# Altium PCB PCB.pcbdoc
Units mil, origin at the board's own origin, x right, y up, seen from the top; angles counter-clockwise.
Board outline 2845.94 x 2020.39 mil, 2 copper layers (Top Layer, Bottom Layer); 66 components, 65 nets, 252 pads, 68 vias.
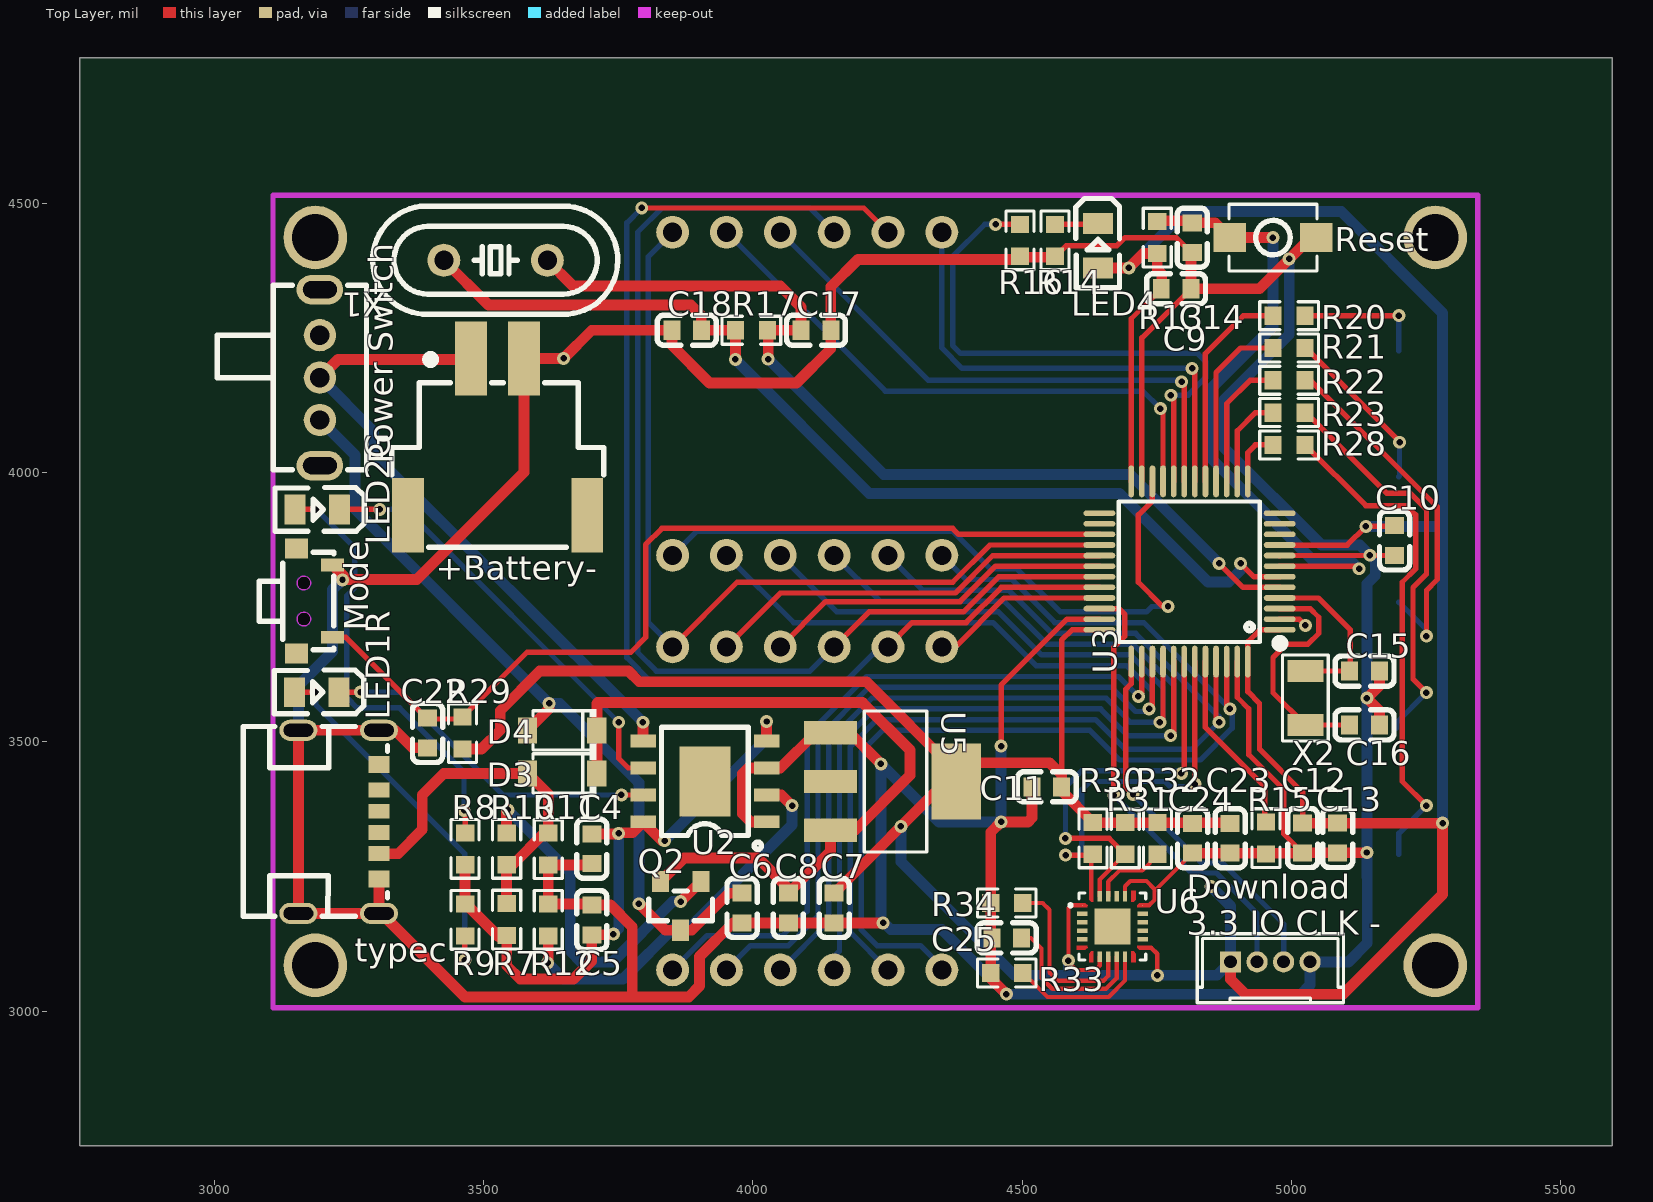
[diagram p0: Top Layer view]
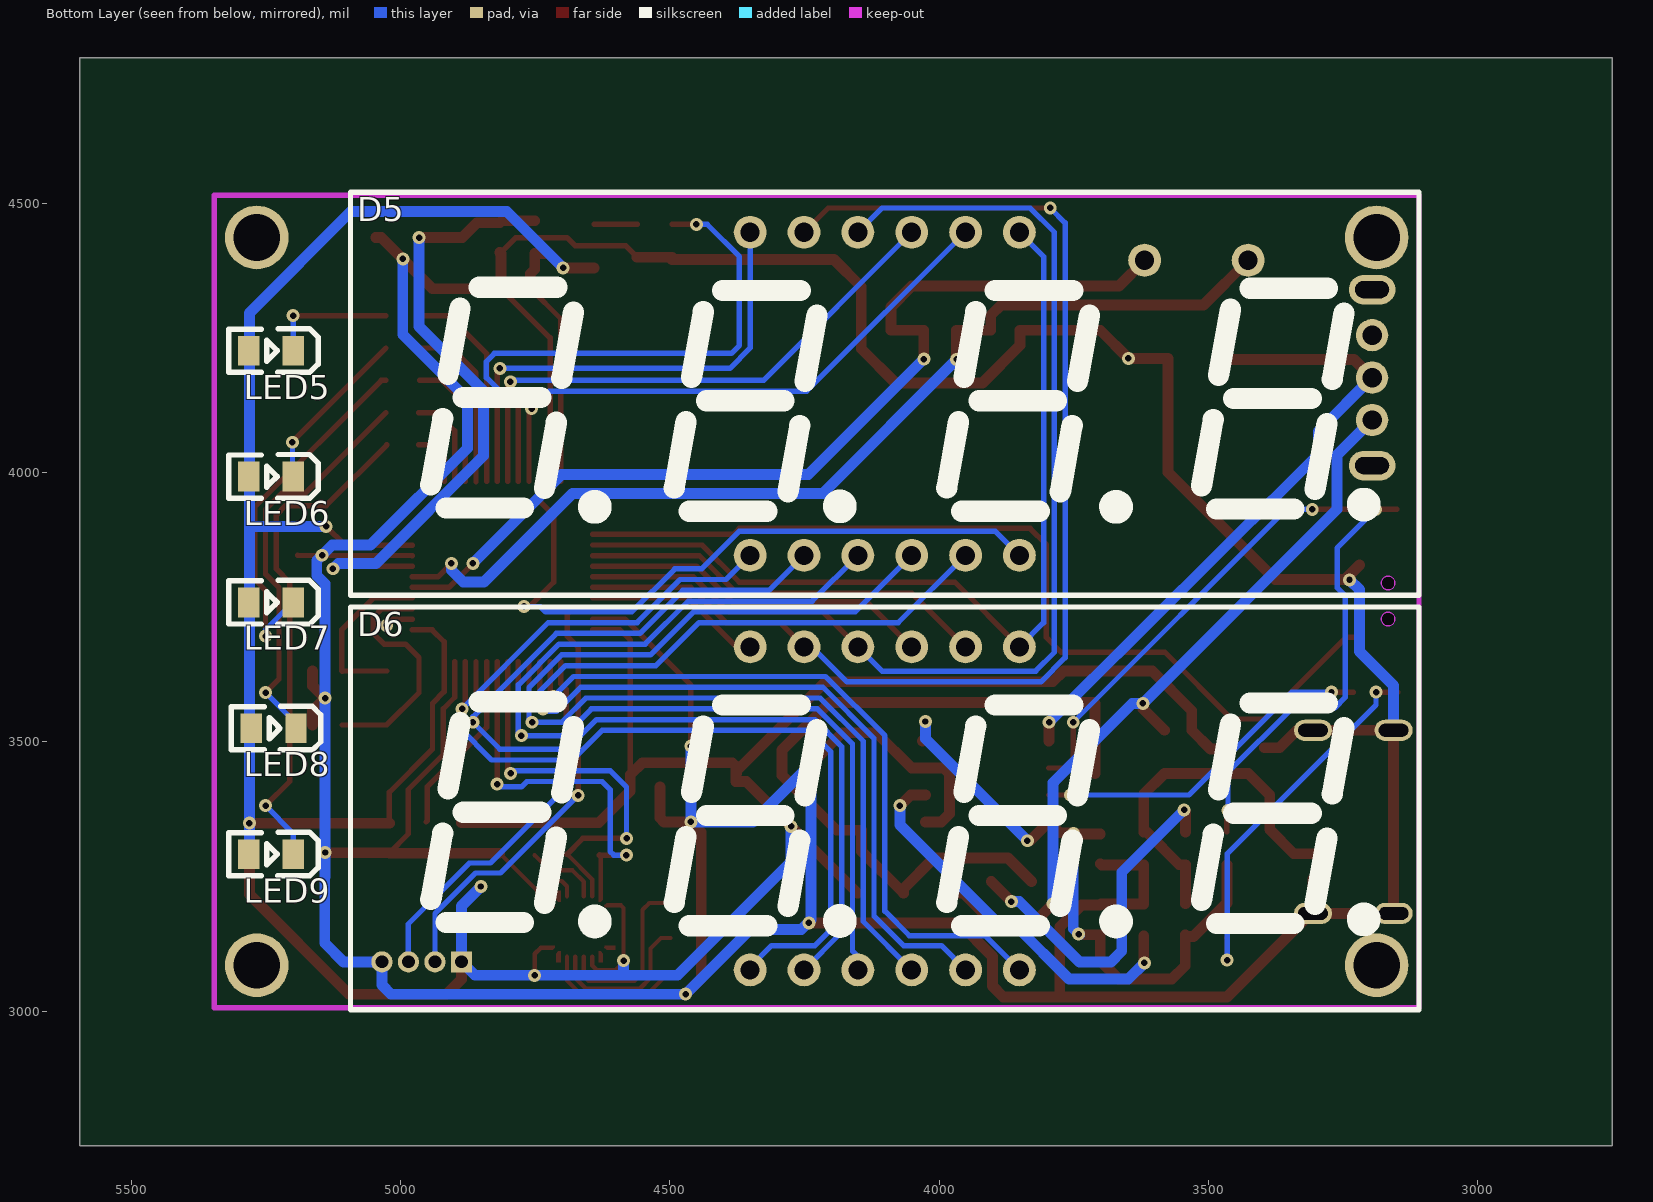
[diagram p1: Bottom Layer view, seen from below]

## Layer stack, top to bottom
Top Layer: signal copper (thickness not stored)
Dielectric: dielectric 12.6, FR-4, Dk 4.8
Bottom Layer: signal copper (thickness not stored)

## Board outline
5595.94,2750 2750,2750 2750,4770.39 5595.94,4770.39

## Design rules (kind name [scope] priority, off if disabled: settings)
BoardOutlineClearance copperThickness1oz [All] p0: genericclearance=10 ignorepadtopadclearanceinfootprint=FALSE except(0: Arc-SplitContinuation Track-SplitContinuation SMDPad-SplitContinuation THPad-SplitContinuation Via-SplitContinuation Fill-SplitContinuation Poly-SplitContinuation Region-SplitContinuation Text-SplitContinuation; 6: Track-CutoutEdge SMDPad-CutoutEdge THPad-CutoutEdge Via-CutoutEdge Region-CutoutEdge; 11.8: Track-OutlineEdge SMDPad-OutlineEdge THPad-OutlineEdge Via-OutlineEdge Fill-OutlineEdge Region-OutlineEdge Poly-OutlineEdge Text-OutlineEdge Fill-CutoutEdge)
BoardOutlineClearance copperThickness2oz [All] p0: genericclearance=10 ignorepadtopadclearanceinfootprint=FALSE except(0: Arc-SplitContinuation Track-SplitContinuation SMDPad-SplitContinuation THPad-SplitContinuation Via-SplitContinuation Fill-SplitContinuation Poly-SplitContinuation Region-SplitContinuation Text-SplitContinuation; 6: Track-CutoutEdge SMDPad-CutoutEdge THPad-CutoutEdge Via-CutoutEdge Region-CutoutEdge; 11.8: Track-OutlineEdge SMDPad-OutlineEdge THPad-OutlineEdge Via-OutlineEdge Fill-OutlineEdge Region-OutlineEdge Poly-OutlineEdge Text-OutlineEdge Fill-CutoutEdge)
Clearance copperThickness1oz [(InNet('$1N2871') OR InNet('GND') OR InNet('$1N3338') OR InNet('VCC3V3') OR InNet('VOUT') OR InNet('RESET') OR InNet('PC15') OR InNet('PC14') OR InNet('OSCIN') OR InNet('OSCOUT') OR InNet('SWIO') OR InNet('SWCLK') OR InNet('VBUS') OR InNet('PA5') OR InNet('PA0') OR InNet('PA4') OR InNet('PA1') OR InNet('PA3') OR InNet('PB11') OR InNet('PB0') OR InNet('PA6') OR InNet('PB10') OR InNet('PB1') OR InNet('PA7') OR InNet('PA2') OR InNet('PA15') OR InNet('PB9') OR InNet('PB3') OR InNet('PB8') OR InNet('PB4') OR InNet('PB15') OR InNet('PA10') OR InNet('PA12') OR InNet('PA8') OR InNet('PA9') OR InNet('PA11') OR InNet('PB5') OR InNet('$1N2192') OR InNet('$1N5823') OR InNet('$1N2208') OR InNet('$1N5869') OR InNet('$1N5919') OR InNet('$1N9002') OR InNet('$1N9250') OR InNet('$1N9224') OR InNet('$1N9276') OR InNet('$1N2044') OR InNet('$1N2879') OR InNet('BOOT0') OR InNet('BOOT1') OR InNet('PB6') OR InNet('PB7') OR InNet('PB14') OR InNet('PB13') OR InNet('PB12') OR InNet('PC13') OR InNet('VBAT') OR InNet('INT') OR InNet('$1N18297') OR InNet('$1N29479') OR InNet('NCS') OR InNet('$1N29483') OR InNet('$1N29475') OR InNet('ESD') OR InNet('ESC'))] p1: gap=7 ignorepadtopadclearanceinfootprint=FALSE except(4: Track-Track; 6: Track-SMDPad SMDPad-SMDPad Track-THPad SMDPad-THPad THPad-THPad Track-Via SMDPad-Via THPad-Via Via-Via SMDPad-Fill THPad-Fill Via-Fill Fill-Fill Track-Region SMDPad-Region THPad-Region Via-Region Region-Region Track-Poly SMDPad-Poly THPad-Poly Via-Poly Fill-Poly Region-Poly Poly-Poly Track-Text SMDPad-Text THPad-Text Via-Text Fill-Text Region-Text Poly-Text Text-Text; 6.9: Track-Hole SMDPad-Hole THPad-Hole Via-Hole Fill-Hole Region-Hole Poly-Hole Text-Hole Sheet-Hole; 11.8: Track-Fill Fill-Region Track-Sheet SMDPad-Sheet THPad-Sheet Via-Sheet Fill-Sheet Region-Sheet Poly-Sheet Text-Sheet)
Clearance copperThickness2oz [All] p1: gap=7 ignorepadtopadclearanceinfootprint=FALSE except(6: Track-SMDPad SMDPad-SMDPad Track-THPad SMDPad-THPad THPad-THPad Track-Via SMDPad-Via THPad-Via Via-Via SMDPad-Fill THPad-Fill Via-Fill Fill-Fill Track-Region SMDPad-Region THPad-Region Via-Region Region-Region Track-Poly SMDPad-Poly THPad-Poly Via-Poly Fill-Poly Region-Poly Poly-Poly Track-Text SMDPad-Text THPad-Text Via-Text Fill-Text Region-Text Poly-Text Text-Text; 6.9: Track-Hole SMDPad-Hole THPad-Hole Via-Hole Fill-Hole Region-Hole Poly-Hole Text-Hole Sheet-Hole; 8: Track-Track; 11.8: Track-Fill Fill-Region Track-Sheet SMDPad-Sheet THPad-Sheet Via-Sheet Fill-Sheet Region-Sheet Poly-Sheet Text-Sheet)
DiffPairsRouting differentialPair [All] p1: maxuncoupledlength=10 minlimit=6 maxlimit=6 mostfreqgap=6 toplayer_minwidth=5 toplayer_prefwidth=10 toplayer_maxwidth=100 bottomlayer_minwidth=5 bottomlayer_prefwidth=10 bottomlayer_maxwidth=100
PasteMaskExpansion pasteMaskExpansion [All] p1: expansion=0
PlaneConnect innerPlane [All] p1: planeconnectstyle=Relief reliefexpansion=20 reliefentries=4 reliefconductorwidth=10 reliefairgap=10
PolygonConnect copperRegion [All] p1: connectstyle=Relief reliefentries=4 reliefconductorwidth=10 polygonreliefangle="90 Angle" airgapwidth=10
RoutingVias viaSize [All] p1: viastyle="Through Hole" holewidth=12.0078 minholewidth=11.811 maxholewidth=248.0314 width=24.0158 minwidth=19.685 maxwidth=393.7008
SolderMaskExpansion solderMaskExpansion [All] p1: useseparateexpansions=TRUE expansion=2 expansionbottom=2
Width copperThickness1oz [All] p1: maxlimit=100 minlimit=5 preferedwidth=10
Width copperThickness2oz [All] p1: maxlimit=100 minlimit=8 preferedwidth=10

## Components (designator, comment, footprint, x,y, rotation, side; value= is the part's Value field where it differs from the comment)
+Battery- "ZX-XH2.54-2PWT" CONN-SMD_2P-P2.54_MEGASTAR_ZX-XH2.54-2PWT 3525.95,4066.38 r0 top
C4 "CGA0603X5R106K100JT" C0603 3700.95,3301.38 r90 top
C5 "CGA0603X7R104K500JT" C0603 3700.95,3169.19 r270 top
C6 "CGA0603X5R106K100JT" C0603 3979.87,3191.37 r90 top
C7 "CGA0603X5R106K100JT" C0603 4150.94,3191.38 r90 top
C8 "CGA0603X5R106K100JT" C0603 4065.95,3191.38 r270 top
C9 "CGA0603X7R104K500JT" C0603 4785.94,4341.38 r180 top
C10 "CGA0603X7R104K500JT" C0603 5191.65,3873.82 r90 top
C11 "CGA0603X7R104K500JT" C0603 4545.94,3416.38 r0 top
C12 "CGA0603X7R104K500JT" C0603 5020.94,3321.38 r90 top
C13 "CGA0603X7R104K500JT" C0603 5085.94,3321.38 r270 top
C14 "CGA0603X7R104K500JT" C0603 4815.94,4436.38 r270 top
C15 "CC0603JRNPO9BN200" C0603 5135.94,3631.38 r180 top
C16 "CC0603JRNPO9BN200" C0603 5135.94,3531.38 r180 top
C17 "CC0603JRNPO9BN200" C0603 4117.19,4264.32 r180 top
C18 "CC0603JRNPO9BN200" C0603 3877.19,4264.32 r0 top
C22 "CGA0603X7R104K500JT" C0603 3395.95,3516.38 r270 top
C23 "CGA0603X7R103K500JT" C0603 4886.47,3320.85 r90 top
C24 "CGA0603X7R104K500JT" C0603 4816.47,3320.85 r90 top
C25 "CGA0603X7R104K500JT" C0603 4471.47,3135.85 r0 top
D3 "1N5819W_C5451628" SOD-123_L2.7-W1.6-LS3.7-RD 3645.95,3441.38 r180 top
D4 "1N5819W_C5451628" SOD-123_L2.7-W1.6-LS3.7-RD 3645.95,3521.38 r180 top
D5 "FJ5461AH 红色" LED-SEG-TH_FJ5461AH 4100.94,4146.38 r180 bottom
D6 "FJ5461AH 红色" LED-SEG-TH_FJ5461AH 4100.94,3376.38 r180 bottom
"Download / 3.3 IO CLK -" "HX-MX1.25-4PZZ-M" CONN-TH_4P-P1.25_HX-1.25MM-4P-ZZ-MS 4960.94,3091.38 r0 top
LED1R "KT-0805G" LED0805-R-RD 3189.99,3592.33 r180 top
LED2G "KT-0805G" LED0805-R-RD 3190.95,3931.38 r180 top
LED4 "KT-0805G" LED0805-R-RD 4640.94,4421.38 r270 top
LED5 "KT-0805G" LED0805-R-RD 5240.94,4226.38 r0 bottom
LED6 "KT-0805G" LED0805-R-RD 5240.94,3992.63 r0 bottom
LED7 "KT-0805G" LED0805-R-RD 5240.94,3758.88 r0 bottom
LED8 "KT-0805G" LED0805-R-RD 5235.94,3525.13 r0 bottom
LED9 "KT-0805G" LED0805-R-RD 5240.94,3291.38 r0 bottom
Mode "TSC01A-TDW1EH3.5" KEY-SMD_4P-L4.6-W2.4_TSC01A-TDW1FH3.5 3185.95,3761.38 r90 top
"Power Switch" "SK12D07VG4" SW-TH_SK12D07VG4 3195.95,4176.38 r270 top
Q2 "AO3401A_C347476" SOT-23_L2.9-W1.3-P1.90-LS2.4-BR 3865.95,3195.52 r90 top
R7 "FRL0603JR400TS" R0603 3542.74,3169.86 r90 top
R8 "FRC0603F1001TS" R0603 3465.61,3301.38 r270 top
R9 "FRC0603F1001TS" R0603 3465.61,3169.18 r90 top
R10 "RCA0310KJLF" R0603 3542.74,3301.38 r90 top
R11 "RCA0310KJLF" R0603 3619.87,3300.7 r90 top
R12 "FRC0603J122 TS" R0603 3619.87,3169.18 r90 top
R13 "RCA0310KJLF" R0603 4750.94,4436.38 r90 top
R14 "FRC0603F5600TS" R0603 4560.94,4431.38 r270 top
R15 "RCA03100KJLF" R0603 4952.86,3321.38 r270 top
R16 "RCA03100KJLF" R0603 4495.94,4431.38 r270 top
R17 "FRC0603J105 TS" R0603 3997.19,4264.32 r0 top
R20 "FRC0603F5600TS" R0603 4995.94,4291.38 r180 top
R21 "FRC0603F5600TS" R0603 4995.94,4231.38 r180 top
R22 "FRC0603F5600TS" R0603 4995.94,4171.38 r180 top
R23 "FRC0603F5600TS" R0603 4995.94,4111.38 r180 top
R28 "FRC0603F5600TS" R0603 4995.94,4051.38 r180 top
R29 "RCA0310KJLF" R0603 3460.95,3516.38 r90 top
R30 "RCA0310KJLF" R0603 4631.47,3320.85 r90 top
R31 "RCA0310KJLF" R0603 4691.47,3320.85 r90 top
R32 "RCA0310KJLF" R0603 4751.47,3320.85 r90 top
R33 "RCA0310KJLF" R0603 4471.47,3070.85 r0 top
R34 "RCA0310KJLF" R0603 4471.47,3200.85 r0 top
Reset "KEY-3*4*2" SW-SMD_L4.0-W2.9-LS5.0 4965.94,4436.38 r0 top
typec "USB-TYPE-C-SMD6" MICRO-USB-SMD_USB-TYPE-C-SMD6 3230.95,3351.38 r270 top
U2 "TP4056_C21713961" ESOP-8_L4.9-W3.9-P1.27-LS6.0-BL-EP 3910.95,3426.38 r90 top
U3 "STM32F103C8T6" LQFP-48_L7.0-W7.0-P0.50-LS9.0-BL 4810.94,3816.38 r90 top
U5 "AMS1117-3.3V_C5205141" SOT-223-3_L6.5-W3.4-P2.30-LS7.0-BR 4260.94,3426.38 r180 top
U6 "MPU-6500_C50278" QFN-24_L3.0-W3.0-P0.40-BL-EP 4667.71,3157.03 r270 top
X1 "8MHZ" HC-49S_L11.5-W5.0-P4.88 3522.19,4394.32 r0 top
X2 "32.768KHZ" CRYSTAL-SMD_L3.2-W1.5-1 5025.94,3581.38 r90 top

## Footprints (in the part's own frame and the unit in brackets; to place one, negate y for a bottom-side part, rotate by r counter-clockwise, add the part's x,y. Pads: shape width x height; smd on the part's side, far side on the other; paste and mask are expansions set on the pad)
C0603 [mm]
  rect 0.8x0.9 smd: 1(-0.7,0) 2(0.7,0)
  silkscreen extent -1.39,-0.71 1.39,0.71
CONN-SMD_2P-P2.54_MEGASTAR_ZX-XH2.54-2PWT [mm]
  rect 1.5x3.5 smd: 1(-1.25,3.7) 2(1.25,3.7) 3(-4.23,-3.7) 4(4.23,-3.7)
  silkscreen extent -5,-5.21 5,3.85
CONN-TH_4P-P1.25_HX-1.25MM-4P-ZZ-MS [mm]
  rect 1x1 hole 0.6: 1(-1.875,0)
  round 1 hole 0.6: 2(-0.625,0) 3(0.625,0) 4(1.875,0)
  silkscreen extent -3.45,-1.92 3.45,1.33
CRYSTAL-SMD_L3.2-W1.5-1 [mm]
  rect 1.05x1.7 smd: 1(-1.275,0) 2(1.275,0)
  silkscreen extent -2.03,-1.08 2.03,1.08
ESOP-8_L4.9-W3.9-P1.27-LS6.0-BL-EP [mm]
  rect 0.6x1.2 smd: 1(-1.905,-2.908) 2(-0.635,-2.908) 3(0.635,-2.908) 4(1.905,-2.908) 5(1.905,2.908) 6(0.635,2.908) 7(-0.635,2.908) 8(-1.905,2.908)
  rect 3.3x2.4 smd: 9(0,0)
  silkscreen extent -3.2,-2.67 2.55,2.05
HC-49S_L11.5-W5.0-P4.88 [mm]
  round 1.56 hole 0.9: 1(-2.44,0) 2(2.44,0)
  silkscreen extent -5.8,-2.54 5.77,2.54
KEY-SMD_4P-L4.6-W2.4_TSC01A-TDW1FH3.5 [mm]
  rect 0.6x1.1 smd: 1(-1.7,-0.85) 2(1.7,-0.85)
  rect 0.95x1.1 smd: 3(2.475,0.85) 4(-2.475,0.85)
  Board Outline Layer circle w0.005: c-0.85,0.5 r0.325
  Board Outline Layer circle w0.005: c0.85,0.5 r0.325
  Board Outline Layer region: -0.85,0.175 -0.991,0.207 -1.104,0.297 -1.167,0.428 -1.167,0.572 -1.104,0.703 -0.991,0.793 -0.85,0.825 -0.85,0.825 -0.709,0.793 -0.596,0.703 -0.533,0.572 -0.533,0.428 -0.596,0.297 -0.709,0.207 -0.85,0.175
  Board Outline Layer region: 0.85,0.175 0.709,0.207 0.596,0.297 0.533,0.428 0.533,0.572 0.596,0.703 0.709,0.793 0.85,0.825 0.85,0.825 0.991,0.793 1.104,0.703 1.167,0.572 1.167,0.428 1.104,0.297 0.991,0.207 0.85,0.175
  Multi-Layer board cut-out: -0.85,0.175 -0.991,0.207 -1.104,0.297 -1.167,0.428 -1.167,0.572 -1.104,0.703 -0.991,0.793 -0.85,0.825 -0.85,0.825 -0.709,0.793 -0.596,0.703 -0.533,0.572 -0.533,0.428 -0.596,0.297 -0.709,0.207 -0.85,0.175
  Multi-Layer board cut-out: 0.85,0.175 0.709,0.207 0.596,0.297 0.533,0.428 0.533,0.572 0.596,0.703 0.709,0.793 0.85,0.825 0.85,0.825 0.991,0.793 1.104,0.703 1.167,0.572 1.167,0.428 1.104,0.297 0.991,0.207 0.85,0.175
  silkscreen extent -2.3,-0.9 2.3,2.6
LED0805-R-RD [mm]
  rect 1x1.4 smd: 1(1.05,0) 2(-1.05,0)
  silkscreen extent -2.22,-1.04 1.99,1.01
LED-SEG-TH_FJ5461AH [mm]
  round 1.55 hole 0.9: 1(-6.35,-7.62) 2(-3.81,-7.62) 3(-1.27,-7.62) 4(1.27,-7.62) 5(3.81,-7.62) 6(6.35,-7.62) 7(6.35,7.62) 8(3.81,7.62) 9(1.27,7.62) 10(-1.27,7.62) 11(-3.81,7.62) 12(-6.35,7.62)
  silkscreen extent -25.2,-9.5 25.2,9.5
LQFP-48_L7.0-W7.0-P0.50-LS9.0-BL [mm]
  oval 0.27x1.5 smd: 1(-2.75,-4.25) 2(-2.25,-4.25) 3(-1.75,-4.25) 4(-1.25,-4.25) 5(-0.75,-4.25) 6(-0.25,-4.25) 7(0.25,-4.25) 8(0.75,-4.25) 9(1.25,-4.25) 10(1.75,-4.25) 11(2.25,-4.25) 12(2.75,-4.25) 25(2.75,4.25) 26(2.25,4.25) 27(1.75,4.25) 28(1.25,4.25) 29(0.75,4.25) 30(0.25,4.25) 31(-0.25,4.25) 32(-0.75,4.25) 33(-1.25,4.25) 34(-1.75,4.25) 35(-2.25,4.25) 36(-2.75,4.25)
  oval 1.5x0.27 smd: 13(4.25,-2.75) 14(4.25,-2.25) 15(4.25,-1.75) 16(4.25,-1.25) 17(4.25,-0.75) 18(4.25,-0.25) 19(4.25,0.25) 20(4.25,0.75) 21(4.25,1.25) 22(4.25,1.75) 23(4.25,2.25) 24(4.25,2.75) 37(-4.25,2.75) 38(-4.25,2.25) 39(-4.25,1.75) 40(-4.25,1.25) 41(-4.25,0.75) 42(-4.25,0.25) 43(-4.25,-0.25) 44(-4.25,-0.75) 45(-4.25,-1.25) 46(-4.25,-1.75) 47(-4.25,-2.25) 48(-4.25,-2.75)
  silkscreen extent -3.59,-4.46 3.3,3.34
MICRO-USB-SMD_USB-TYPE-C-SMD6 [mm]
  oval 1x1.8 hole 0.6 slot 1.4 at 90 deg: 1(-4.32,1.9) 2(4.32,1.9) 3(-4.32,-1.9) 4(4.32,-1.9)
  rect 0.7x1 smd: A5(-0.5,1.9) A9(1.5,1.9) B5(0.5,1.9) B9(-1.5,1.9)
  rect 0.8x1 smd: A12(2.7,1.9) B12(-2.7,1.9)
  silkscreen extent -4.5,-4.5 4.45,2.3
QFN-24_L3.0-W3.0-P0.40-BL-EP [mm]
  round 0.04 smd: 1(-1,-1.427) 6(1,-1.427) 7(1.427,-1) 12(1.427,1) 13(1,1.427) 18(-1,1.427) 19(-1.427,1) 24(-1.427,-1)
  rect 0.2x0.505 smd: 2(-0.6,-1.427) 3(-0.2,-1.427) 4(0.2,-1.427) 5(0.6,-1.427) 14(0.6,1.427) 15(0.2,1.427) 16(-0.2,1.427) 17(-0.6,1.427)
  rect 0.505x0.2 smd: 8(1.427,-0.6) 9(1.427,-0.2) 10(1.427,0.2) 11(1.427,0.6) 20(-1.427,0.6) 21(-1.427,0.2) 22(-1.427,-0.2) 23(-1.427,-0.6)
  rect 1.7x1.7 smd: 25(0,0)
  Top Layer region: -1.1,1.68 -0.9,1.68 -0.9,1.175 -1,1.174 -1.1,1.274
  Top Layer region: -1.68,-1.1 -1.274,-1.1 -1.174,-1 -1.175,-0.9 -1.68,-0.9
  Top Layer region: 1.68,-1.1 1.275,-1.1 1.175,-1 1.175,-0.9 1.68,-0.9
  Top Layer region: 1.68,1.1 1.274,1.1 1.174,1 1.175,0.9 1.68,0.9
  Top Layer region: 1.1,1.68 0.9,1.68 0.9,1.175 1,1.174 1.1,1.274
  Top Layer region: -1.1,-1.68 -0.9,-1.68 -0.9,-1.175 -1,-1.174 -1.1,-1.275
  Top Layer region: 1.1,-1.68 0.9,-1.68 0.9,-1.175 1,-1.175 1.1,-1.275
  Top Layer region: -1.68,1.1 -1.274,1.1 -1.174,1 -1.175,0.9 -1.68,0.9
  silkscreen extent -1.58,-2.05 1.58,1.58
R0603 [mil]
  rect 31.75x34.02 smd: 1(-29.66,0) 2(29.66,0)
  silkscreen extent -55,-26 55,26
SOD-123_L2.7-W1.6-LS3.7-RD [mm]
  rect 0.91x1.22 smd: 1(-1.635,0) 2(1.635,0)
  silkscreen extent -1.6,-1 1.38,1
SOT-23_L2.9-W1.3-P1.90-LS2.4-BR [mm]
  rect 1x0.8 smd: 1(1.15,-0.95) 2(1.15,0.95) 3(-1.15,0)
  silkscreen extent -0.7,-1.5 0.7,1.5
SOT-223-3_L6.5-W3.4-P2.30-LS7.0-BR [mm]
  rect 2.5x1.1 smd: 1(2.97,-2.3) 2(2.97,0) 3(2.97,2.3)
  rect 2.34x3.6 smd: 4(-2.97,0)
  silkscreen extent -1.57,-3.33 1.37,3.33
SW-SMD_L4.0-W2.9-LS5.0 [mm]
  rect 1.53x1.36 smd: 1(-2.035,0) 2(2.035,0)
  silkscreen extent -2.08,-1.58 2.08,1.58
SW-TH_SK12D07VG4 [mil]
  round 60 hole 36: 1(-78.74,0) 2(0,0) 3(78.74,0)
  oval 55.12x86.61 hole 31.5 slot 62.99 at 90 deg: 4(163.38,0) 5(-163.39,0)
  silkscreen extent -171,-191 171,87

## Free pads (board coordinates)
  round 118.11 hole 86.61: 1(3187.56,4436.65) 1(3187.56,3085.12) 1(5267.2,4436.65) 1(5267.2,3085.12)

## Via types
v1: diameter 24.02, hole 12.01, Top Layer to Bottom Layer, 68 vias

## Nets (pads, with @x,y where several pads share a name; then routed paths per layer and width w, separated by ;. In a path a pad name is that pad's centre, name@x,y a point inside that pad or via, vN(x,y) a via of type N, cw(c..) or ccw(c..) an arc to the next point about the centre after c; other vN are vias at no path point)
$1N2044: Q2.1 R10.2 | length 664.9
  Top Layer w20: R10.2@3542.74,3332.68 3542.74,3371.45 v1(3545,3373.71) ; v1@3866,3203.45 Q2.1
  Bottom Layer w20: v1(3545,3373.71) 3660.95,3257.76 3660.95,3237.76 3660.95,3111.38 3680.95,3091.38 3739.25,3091.38 3851.32,3203.45 v1@3865.95,3203.45
  other v1: 3865.95,3203.4
$1N2192: LED1R.2 U2.7 | length 644.4
  Top Layer w10: LED1R.2@3231.11,3592.33 v1(3271.34,3592.33) ; v1(3756.02,3401.38) U2.7
  Bottom Layer w10: v1(3271.34,3592.33) 3344.99,3592.33 3535.95,3401.38 v1(3756.02,3401.38)
$1N2208: LED2G.2 U2.6 | length 802.8
  Top Layer w10: LED2G.2@3232.06,3931.74 v1(3307.06,3931.74) ; v1(3750.95,3536.38) 3750.95,3469.06 3768.63,3451.38 U2.6
  Bottom Layer w10: v1(3307.06,3931.74) 3355.58,3931.74 v1(3750.95,3536.38)
$1N2871: C4.2 C5.2 R7.1 R8.2 R9.2 U2.4 U2.8 | length 1192.1
  Top Layer w20: R8.2 3465.61,3200.48 3527.52,3138.56 R7.1@3542.74,3138.56 ; R7.1@3543.01,3141.71 3543.01,3084.31 3567.95,3059.37 3667.14,3059.37 3700.95,3093.18 C5.2 3739.53,3141.63 v1(3740.95,3143.04) ; C4.2 3748.5,3328.94 3750.95,3331.38 3776.45,3331.38 U2.8 3831.45,3316.38 v1(3835.95,3316.38) ; v1(4025.45,3537.77) 4025.45,3506.88 U2.4@4030.95,3501.38
  Bottom Layer w20: v1@3739.53,3141.63 3750.95,3153.04 v1@3750.95,3328.94 ; v1(3835.95,3316.38) 4025.45,3505.88 v1(4025.45,3537.77)
  other v1: 3750.53,3330.16
$1N2879: R12.1 U2.2 | length 723
  Top Layer w20: v1@3619.87,3093.04 R12.1 ; U2.2 4052.91,3401.38 v1(4072.91,3381.38)
  Bottom Layer w20: v1(3618.83,3089.37) 3648.83,3059.37 3650.43,3059.37 ; 3650.65,3059.37 3758.94,3059.37 3857.95,3158.38 3885.95,3158.38 4072.91,3345.34 v1(4072.91,3381.38)
$1N3338: "Power Switch.3" C6.2 D4.2 Q2.3 | length 1458.9
  Top Layer w20: D4.2 3621.57,3561.38 v1(3621.57,3571.38) ; v1(3788.41,3199.38) 3837.54,3150.25 Q2.3 3886.42,3150.25 3955.11,3218.93 C6.2
  Bottom Layer w20: 3195.95,4097.64 3260.95,4032.64 3260.95,3932 v1(3621.57,3571.38) 3641.57,3571.38 3784.07,3428.88 ; 3785.95,3426.38 3788.41,3423.91 v1(3788.41,3199.38)
$1N5823: LED1R.1 R9.1 | length 694.5
  Top Layer w10: LED1R.1 v1(3188.64,3592.33) ; v1(3465.23,3094.52) 3465.23,3135.66 R9.1@3465.95,3136.38
  Bottom Layer w10: v1(3188.64,3592.33) 3188.64,3568.68 3465.23,3292.09 v1(3465.23,3094.52)
$1N5869: LED2G.1 R8.1 | length 811.4
  Top Layer w10: LED2G.1@3149.96,3931.61 3189.36,3931.61 v1(3189.59,3931.38) ; v1(3463.62,3372.68) 3465.61,3370.69 R8.1@3465.61,3332.68
  Bottom Layer w10: v1(3189.59,3931.38) 3260.95,3860.03 3260.95,3786.38 3245.95,3771.38 3245.95,3582.51 3265.24,3563.21 3344.11,3563.21 3463.62,3443.7 v1(3463.62,3372.68)
$1N5919: LED4.2 R14.1 | length 79.6
  Top Layer w10: R14.1 LED4.2@4640.58,4461.04
$1N9002: LED5.2 R20.1 | length 237.4
  Top Layer w10: R20.1@5027.24,4291.38 v1(5199.63,4291.38)
  Bottom Layer w10: LED5.2 v1(5199.63,4291.38)
$1N9224: LED7.2 R22.1 | length 673.4
  Top Layer w10: R22.1@5027.24,4171.38 5035.95,4171.38 5270.94,3936.38 5270.94,3801.38 5250.94,3781.38 v1(5250.94,3696.38)
  Bottom Layer w10: LED7.2@5199.83,3759.24 5250.94,3708.13 v1(5250.94,3696.38)
$1N9250: LED6.2 R21.1 | length 311.3
  Top Layer w10: R21.1@5027.24,4231.38 5200.94,4057.68 v1(5200.94,4056.38)
  Bottom Layer w10: LED6.2 5200.94,3993.98 v1(5200.94,4056.38)
$1N9276: LED8.2 R23.1 | length 748.1
  Top Layer w10: R23.1@5027.24,4111.38 5177.24,3961.38 5220.94,3961.38 5250.94,3931.38 5250.94,3811.38 5225.94,3786.38 5225.94,3616.38 v1(5250.94,3591.38)
  Bottom Layer w10: LED8.2@5194.83,3525.49 5194.83,3535.26 v1(5250.94,3591.38)
$1N18297: LED9.2 R28.1 | length 939.5
  Top Layer w10: R28.1 5138.44,3938.54 5213.78,3938.54 5230.94,3921.38 5230.94,3821.38 5205.94,3796.38 5205.94,3433.13 5205.94,3426.38 v1(5250.94,3381.38)
  Bottom Layer w10: LED9.2 5199.6,3330.03 v1(5250.94,3381.38)
$1N29475: R34.2 U6.9 | length 326.2
  Top Layer w7.87: R34.2 4538.17,3200.85 4550.94,3188.08 4550.94,3071.38 4565.94,3056.38 4650.94,3056.38 4659.84,3065.28 U6.9
$1N29479: C25.2 U6.10 | length 295.9
  Top Layer w7.87: C25.2 4516.47,3135.85 4535.94,3116.38 4535.94,3061.38 4555.94,3041.38 4655.94,3041.38 4675.58,3061.02 U6.10
$1N29483: R33.2 U6.11 | length 263.6
  Top Layer w7.87: R33.2@4502.77,3070.85 4547.25,3026.38 4660.94,3026.38 4691.33,3056.77 U6.11
BOOT0: R15.1 U3.44 | length 344.6
  Top Layer w10: U3.44 4840.48,3526.85 4950.94,3416.38 4950.94,3352.95 R15.1
BOOT1: R16.1 U3.20 | length 1067.3
  Top Layer w10: v1(4450.94,4461.04) R16.1 ; v1(4776.41,4143.7) 4781.41,4138.7 U3.20
  Bottom Layer w10: v1(4450.94,4461.04) 4430.6,4461.04 4370.94,4401.38 4370.94,4236.38 4385.94,4221.38 4825.94,4221.38 4840.94,4206.38 4840.94,4176.38 4808.27,4143.7 v1(4776.41,4143.7)
ESC: U6.7
ESD: U6.21
GND: "Download / 3.3 IO CLK -.4" +Battery-.2 C4.1 C5.1 C6.1 C7.1 C8.2 C9.1 C10.1 C11.1 C12.1 C13.2 C14.2 C15.1 C16.1 C17.1 C18.1 C22.2 C23.1 C24.1 C25.1 Mode.2 R11.1 R12.2 R14.2 R15.2 R16.2 R33.1 R34.1 Reset.2 typec.1 typec.2 typec.3 typec.4 typec.A12 U2.1 U2.3 U3.8 U3.23 U3.35 U3.47 U5.1 U6.18 U6.20 | length 11376.4
  Top Layer w7.87: U6.20 4691.33,3231.77 4700.94,3241.38 4730.94,3241.38 4745.94,3226.38 4745.94,3206.38 4735.97,3196.4 U6.18 ; 4745.94,3216.38 4745.94,3222.76 C24.1
  Top Layer w10: v1(4460.94,3491.98) 4460.94,3605.26 4583.48,3727.8 U3.35 ; R14.2@4560.94,4400.08 4582.24,4421.38 4676.26,4421.38 4691.26,4436.38 4772.63,4436.38 4785.94,4436.38 C14.2@4814.73,4407.6 ; U3.23 4722.36,4250.24 C9.1 ; U3.47 4899.52,3582.8 4920.94,3561.38 4920.94,3476.38 4985.94,3411.38 4985.94,3328.82 C12.1 ; U3.8 C10.1
  Top Layer w20: typec.4@3145.86,3181.3 3310.86,3181.3 typec.2@3310.95,3181.38 ; typec.3@3145.86,3521.46 typec.1@3310.43,3521.46 ; typec.4 typec.3 ; v1(3237.95,3800.7) 3237.95,3809.76 Mode.2 3246.33,3801.38 3375.95,3801.38 3575.16,4000.59 +Battery-.2 v1(3648.5,4212.04) 3700.78,4264.33 C18.1 ; typec.2 typec.A12 ; typec.1 3335.35,3521.46 3367.99,3488.82 C22.2 ; typec.2@3310.43,3181.3 3465.35,3026.38 3880.95,3026.38 3900.95,3046.38 3900.95,3101.38 3963.38,3163.81 C6.1 v1(4241.92,3163.81) ; R11.1@3619.87,3269.4 R12.2 3698.85,3198.84 C5.1 3735.57,3196.76 3775.95,3156.38 3775.95,3026.38 ; R11.1 3698.17,3271.04 C4.1 ; C18.1 3849.63,4236.38 3919.63,4166.38 4080.95,4166.38 4144.75,4230.18 C17.1 4144.75,4345.18 4195.29,4395.72 R16.2@4495.94,4395.72 ; U2.1 3995.95,3351.38 3980.95,3366.38 3980.95,3440.67 3991.66,3451.38 U2.3 4051.05,3451.38 4116.6,3516.93 U5.1 4179.99,3516.93 v1(4237.89,3459.03) ; v1(4470.94,3031.38) 4441.81,3060.51 R33.1 4441.81,3332.24 v1(4460.94,3351.38) 4508.51,3351.38 ; R16.2@4495.94,4400.08 R14.2@4560.94,4400.08 ; 4510.94,3351.38 4518.39,3358.82 C11.1 ; C14.2 4813.51,4406.38 C9.1 4940.94,4341.38 5035.94,4436.38 Reset.2 ; C24.1 5020.42,3293.29 C12.1 v1@5139.98,3293.82 ; C16.1 5163.51,3557.92 5140.35,3581.07 5163.51,3604.22 C15.1
  Bottom Layer w20: typec.3 3156.14,3604.42 3219.4,3667.69 3219.4,3783.09 v1(3237.95,3800.7) ; v1(4460.94,3491.98) v1(4460.94,3351.38) 4345.54,3351.38 v1(4237.89,3459.03) 4237.89,3169.43 4255.94,3151.38 4350.94,3151.38 v1(4470.94,3031.38) 5017.75,3031.38 5034.77,3048.4 5034.77,3091.38 5105.95,3091.38 5140.94,3126.38 5140.94,3250.08 ; v1@4995.94,4397.24 4995.94,4256.38 4875.94,4136.38 4875.94,4045.26 5055.89,3865.31 5127.01,3865.31 5155.63,3836.69 5155.63,3808.88 5140.35,3793.61 5140.35,3249.49
  other v1: 5140.35,3294.49 5140.35,3581.29 5145.79,3846.53 4995.94,4396.86
INT: U6.12
NCS: R32.1 U6.22 | length 139.1
  Top Layer w7.87: U6.22 4659.84,3240.28 4680.94,3261.38 4723.3,3261.38 R32.1@4751.47,3289.55
OSCIN: C17.2 R17.2 U3.5 X1.2 | length 1790.7
  Top Layer w10: v1(4865.94,3831.38) 4910.48,3786.85 U3.5
  Top Layer w20: X1.2 3666.19,4346.38 4050.95,4346.38 4089.63,4307.7 C17.2 4028.49,4264.32 v1(4028.49,4210.84)
  Bottom Layer w20: v1(4028.49,4210.84) 4242.95,3996.38 4700.94,3996.38 v1(4865.94,3831.38)
OSCOUT: C18.2 R17.1 U3.6 X1.1 | length 1878.2
  Top Layer w10: v1(4905.94,3831.38) 4930.78,3806.54 U3.6
  Top Layer w20: X1.1 3509.07,4311.38 3884.84,4311.38 3903.97,4292.25 3903.97,4265.09 C18.2 ; C18.2@3903.97,4264.32 R17.1@3965.89,4264.32 ; v1(3967.53,4210.08) R17.1
  Bottom Layer w20: v1(3967.53,4210.08) 4216.22,3961.38 4680.94,3961.38 4845.48,3796.85 4883.68,3796.85 4905.94,3819.11 v1(4905.94,3831.38)
PA0: U3.10
PA1: U3.11
PA2: U3.12
PA3: R28.2 U3.13 | length 106.5
  Top Layer w10: U3.13 4919.22,4037.3 4933.3,4051.38 R28.2
PA4: R23.2 U3.14 | length 174.7
  Top Layer w10: U3.14 4899.52,4077.61 4933.3,4111.38 R23.2
PA5: R22.2 U3.15 | length 247
  Top Layer w10: U3.15 4879.85,4127.88 4923.35,4171.38 R22.2@4964.65,4171.38
PA6: R21.2 U3.16 | length 327.7
  Top Layer w10: U3.16@4860.15,3982.95 4860.15,4185.59 4905.94,4231.38 R21.2
PA7: R20.2 U3.17 | length 392.2
  Top Layer w10: U3.17 4840.48,4220.91 4910.94,4291.38 R20.2
PA8: D6.8 U3.29 | length 762.9
  Top Layer w10: D6.8 4050.95,3776.38 4375.94,3776.38 4445.48,3845.91 U3.29
PA9: D6.9 U3.30 | length 654.7
  Top Layer w10: D6.9 4134.96,3760.39 4385.01,3760.39 4450.83,3826.22 U3.30
PA10: D5.10 D6.10 U3.31 | length 2127
  Top Layer w10: D6.10 4215.94,3741.38 4390.94,3741.38 4456.1,3806.54 U3.31
  Bottom Layer w10: D6.10 4105.94,3631.38 3820.95,3631.38 3785.95,3666.38 3785.95,4446.38 3830.95,4491.38 4105.94,4491.38 D5.10
PA11: D5.11 D6.11 U3.32 | length 2291.6
  Top Layer w10: v1(3793.68,4491.63) 4205.94,4491.38 D5.11 ; D6.11 4295.94,3721.38 4395.94,3721.38 4461.41,3786.85 U3.32
  Bottom Layer w10: v1(3793.68,4491.63) 3765.95,4463.89 3765.95,4461.38 3765.95,3656.38 3810.95,3611.38 4170.94,3611.38 4235.94,3676.38 D6.11
PA12: D6.12 U3.33 | length 330.3
  Top Layer w10: D6.12 4375.94,3676.38 4466.73,3767.17 U3.33
PA15: D6.6 U3.38 | length 1364.4
  Top Layer w10: v1(4715.98,3584.27) 4722.36,3590.65 U3.38
  Bottom Layer w10: D6.6 3914.79,3140.23 4055.53,3140.23 4100.95,3185.65 4100.95,3511.38 4210.94,3621.38 4678.88,3621.38 v1(4715.98,3584.27)
PB0: D5.12 U3.18 | length 907.5
  Top Layer w10: v1(4815.78,4193.7) 4820.78,4188.7 U3.18
  Bottom Layer w10: D5.12 4350.94,4231.38 4388.62,4193.7 v1(4815.78,4193.7)
PB1: D5.9 U3.19 | length 1047.2
  Top Layer w10: v1(4796.1,4168.7) 4801.1,4163.7 U3.19
  Bottom Layer w10: D5.9 4325.94,4171.38 4748.73,4171.38 4793.43,4171.38 v1(4796.1,4168.7)
PB3: D5.5 D6.5 U3.39 | length 2234.9
  Top Layer w10: v1(4735.94,3561.38) 4742.05,3567.48 U3.39
  Bottom Layer w10: D6.5 3995.95,3121.38 4065.95,3121.38 4120.94,3176.38 4120.94,3206.38 4120.94,3506.38 4215.94,3601.38 4665.94,3601.38 4673.44,3593.88 4710.94,3556.38 v1@4735.94,3556.38 ; D5.5 4075.95,3721.38 4445.94,3721.38 4525.94,3641.38 4693.84,3641.38 4742.05,3593.17 4742.05,3567.48 v1(4735.94,3561.38)
PB4: D5.4 D6.4 U3.40 | length 2123.3
  Top Layer w10: v1(4755.94,3536.38) 4761.73,3542.17 U3.40
  Bottom Layer w10: D6.4 4140.94,3166.38 4140.94,3501.38 4220.94,3581.38 4655.94,3581.38 4700.94,3536.38 v1(4755.94,3536.38) 4761.73,3542.17 4761.73,3600.59 4700.94,3661.38 4535.94,3661.38 4455.94,3741.38 4155.94,3741.38 D5.4
PB5: D5.3 D6.3 U3.41 | length 2053.6
  Top Layer w10: v1(4775.94,3511.38) 4781.41,3516.85 U3.41
  Bottom Layer w10: D6.3 4150.94,3101.38 4160.94,3111.38 4160.94,3496.38 4225.94,3561.38 4645.94,3561.38 4695.94,3511.38 v1(4775.94,3511.38) 4781.41,3516.85 4781.41,3605.91 4705.94,3681.38 4545.94,3681.38 4465.94,3761.38 4235.94,3761.38 D5.3
PB6: R31.1 U3.42 U6.23 | length 753.4
  Top Layer w7.87: U6.23 4644.09,3244.14 R31.1@4689.5,3289.55
  Top Layer w10: v1(4580.5,3320.85) 4661.81,3320.85 R31.1 ; v1(4795.94,3441.38) 4801.1,3446.54 U3.42
  Bottom Layer w10: v1(4580.5,3320.85) 4580.5,3415.94 4610.94,3446.38 4790.53,3446.38 4790.94,3446.38 v1(4795.94,3441.38)
PB7: R30.1 U3.43 U6.24 | length 722.9
  Top Layer w7.87: U6.24 4628.34,3288.78 R30.1@4630.94,3291.38
  Top Layer w10: v1(4580.76,3289.55) R30.1@4631.47,3289.55 ; v1(4820.73,3421.38) 4820.78,3421.44 U3.43
  Bottom Layer w10: v1@4585.76,3289.55 4604.12,3289.55 4610.94,3296.38 4610.94,3411.38 4625.94,3426.38 4765.73,3426.38 4775.73,3416.38 4815.73,3416.38 v1(4820.73,3421.38)
PB8: D5.2 D6.2 U3.45 | length 2057.5
  Top Layer w10: U3.45 4860.15,3542.17 v1(4865.94,3536.38)
  Bottom Layer w10: D6.2 4180.94,3146.38 4180.94,3491.38 4230.94,3541.38 4635.94,3541.38 4690.94,3486.38 4795.94,3486.38 4815.94,3486.38 v1(4865.94,3536.38) 4865.94,3546.38 4710.94,3701.38 4555.94,3701.38 4475.94,3781.38 4315.94,3781.38 D5.2
PB9: D5.1 D6.1 U3.46 | length 2047.7
  Top Layer w10: U3.46 4879.85,3567.48 v1(4885.94,3561.38)
  Bottom Layer w10: D6.1 4350.94,3081.38 4310.94,3121.38 4230.94,3121.38 4200.94,3151.38 4200.94,3481.38 4240.94,3521.38 4625.94,3521.38 4638.44,3508.88 4680.94,3466.38 4830.94,3466.38 4889.94,3525.38 4889.94,3557.38 v1(4885.94,3561.38) 4725.94,3721.38 4560.94,3721.38 4480.94,3801.38 4395.94,3801.38 D5.1
PB10: D5.8 U3.21 | length 1078.6
  Top Layer w10: v1(4756.73,4118.7) 4761.73,4113.7 U3.21
  Bottom Layer w10: D5.8 4245.94,4151.38 4724.06,4151.38 v1(4756.73,4118.7)
PB11: D5.6 U3.22 | length 1276.7
  Top Layer w10: U3.22 4742.05,3947.48 4715.94,3921.38 4715.94,3796.38 4760.94,3751.38 v1(4770.94,3751.38)
  Bottom Layer w10: D5.6 3895.95,3891.38 4370.94,3891.38 4440.94,3821.38 4490.94,3821.38 4570.94,3741.38 4730.94,3741.38 4740.94,3751.38 v1(4770.94,3751.38)
PB12: U3.25
PB13: U3.26
PB14: C22.1 Mode.1 R29.2 U3.27 | length 1739.4
  Top Layer w10: Mode.1@3219.4,3694.54 3243.89,3694.54 3395.95,3542.48 3457.05,3542.48 3580.95,3666.38 3608.81,3666.38 3773.39,3666.38 3800.95,3693.93 3800.95,3866.38 3830.95,3896.38 4370.94,3896.38 4382.05,3885.28 U3.27
PB15: D5.7 D6.7 U3.28 | length 1678.3
  Top Layer w10: D6.7 3970.95,3796.38 4370.94,3796.38 4440.15,3865.59 U3.28
  Bottom Layer w10: D6.7 3805.95,3721.38 3805.95,4401.38 D5.7
PC13: U3.2 | length 52.4
  Top Layer w10: U3.2 5014.52,3727.8 v1(5025.94,3716.38)
PC14: C16.2 U3.3 X2.1 | length 445.6
  Top Layer w10: U3.3 5034.85,3747.48 5050.94,3731.38 5050.94,3701.38 5030.94,3681.38 4990.94,3681.38 4965.94,3656.38 4965.94,3591.18 5025.94,3531.18 5026.15,3531.38 C16.2
PC15: C15.2 U3.4 X2.2 | length 315.1
  Top Layer w10: U3.4 5050.27,3767.17 5109.16,3708.28 5109.16,3632.16 C15.2 ; X2.2 C15.2@5108.58,3631.57
RESET: C14.1 R13.2 Reset.1 U3.7 | length 1206.7
  Top Layer w10: U3.7 5121.1,3826.22 v1(5125.94,3821.38)
  Top Layer w20: R13.2@4750.95,4467.68 4812.21,4467.68 C14.1 4858.27,4463.94 Reset.1 v1(4965.82,4436.38)
  Bottom Layer w20: v1@4965.94,4436.38 4965.94,4271.38 4845.94,4151.38 4845.94,4031.38 5045.94,3831.38 5060.94,3831.38 ; 5053.44,3831.38 5115.94,3831.38 v1(5125.94,3821.38)
SWCLK: "Download / 3.3 IO CLK -.3" U3.37 | length 706.6
  Top Layer w10: U3.37 4702.68,3608.07 4692.19,3597.59 4692.19,3438.83 4692.19,3416.33 v1(4705.94,3402.58)
  Bottom Layer w10: v1(4705.94,3402.58) 4833.54,3274.99 4872.34,3274.99 4985.94,3161.38 4985.94,3091.77 4985.56,3091.38
SWIO: "Download / 3.3 IO CLK -.2" U3.34 | length 842.8
  Top Layer w10: U3.34 4679.85,3747.48 4690.94,3736.38 4690.94,3696.38 4670.3,3675.73 4670.3,3455.73 v1(4670.3,3400.73)
  Bottom Layer w10: v1(4670.3,3400.73) 4814.65,3256.38 4860.94,3256.38 4936.34,3180.99 4936.34,3091.38
VBAT: "Power Switch.2" +Battery-.1 U2.5 | length 1212.4
  Top Layer w20: 3195.95,4176.38 3229.64,4210.07 +Battery-.1@3470,4210.07 ; v1(3795.95,3536.38) 3795.95,3501.88 U2.5
  Bottom Layer w20: 3195.95,4176.38 3295.95,4076.38 3295.95,4034.22 v1(3795.95,3536.38)
VBUS: D3.2 R7.2 R10.1 R11.2 typec.A9 | length 673.2
  Top Layer w20: typec.A9 3341.28,3292.33 3385.95,3337 3385.95,3401.38 3425.95,3441.38 D3.2 3619.87,3403.08 3619.87,3332 3614.23,3332 3553.95,3271.72 R10.1 ; R7.2 R10.1@3542.74,3270.08
VCC3V3: "Download / 3.3 IO CLK -.1" C7.2 C9.2 C10.2 C11.2 C12.2 C13.1 C23.2 C24.2 LED4.1 LED5.1 LED6.1 LED7.1 LED8.1 LED9.1 R13.1 R29.1 R30.2 R31.2 R32.2 U3.1 U3.9 U3.24 U3.36 U3.48 U5.4 U6.1 U6.8 U6.13 | length 7595.7
  Top Layer w7.87: U6.1 4590.94,3196.38 4585.94,3191.38 4585.94,3091.38 4600.94,3076.38 4635.94,3076.38 4644.09,3084.53 U6.8 ; U6.13 4739.66,3117.66 4750.94,3106.38 v1@4750.94,3066.38
  Top Layer w10: C11.2 4573.51,3688.94 4592.68,3708.11 U3.36 ; U3.24 4702.68,4285.67 C9.2@4759.16,4342.16 ; U3.1 4941.44,3708.11 4919.22,3685.88 U3.48 4919.22,3593.11 4940.94,3571.38 4940.94,3486.38 5020.94,3406.38 C12.2 ; U3.9 4978.54,3865.31 5103.63,3865.31 v1(5138.42,3900.11) C10.2@5191.14,3900.11
  Top Layer w20: R29.1 3496.28,3486.72 3530.95,3521.38 3530.95,3557.91 3604.41,3631.38 3768.88,3631.38 3788.88,3611.38 4210.94,3611.38 4375.94,3446.38 U5.4@4375.94,3441.38 ; C7.2 4358.39,3426.38 U5.4 4377.87,3455.17 4384.09,3461.38 4550.94,3461.38 4573.51,3438.82 C11.2 4573.51,3408.48 4632.04,3349.94 C23.2@4887.06,3349.94 ; LED4.1 v1(4698.25,4380.03) 4724.94,4406.72 R13.1 ; R13.1@4750.94,4405.08 4750.94,4377.55 4759.16,4369.33 4759.16,4342.16 C9.2 ; 4887.12,3091.38 4887.12,3058.9 4914.65,3031.38 5095.94,3031.38 5280.94,3216.38 v1@5280.94,3349.77 ; C12.2 v1(5281.03,3348.97) ; C10.2@5190.39,3900.11 C10.2
  Bottom Layer w20: v1@4275,3342.99 4275,3277.32 4485.94,3066.38 4862.12,3066.38 4887.12,3091.38 4887.12,3195.2 v1(4850.94,3231.38) ; 4585.94,3066.38 v1(4585.94,3093.9) ; v1(4698.25,4380.03) 4803.01,4484.79 5092.53,4484.79 5280.94,4296.38 5280.94,3348.97 LED9.1@5280.94,3289.03 ; v1(5138.42,3900.11) 5280.63,3900.11
  other v1: 4751.2,3066.38 4274.84,3342.84
VOUT: C8.1 D3.1 D4.1 Q2.2 U5.3 | length 1423
  Top Layer w20: D3.1 3710.32,3571.38 3712.14,3573.19 3789.13,3573.19 4169.29,3573.19 4203.37,3573.19 4291.94,3484.62 4291.94,3437.81 4189.96,3335.83 U5.3 4144.02,3297.01 C8.1 4065.95,3227.76 4009.38,3284.33 3872.07,3284.33 Q2.2
pads on no net: "Power Switch.1" "Power Switch.4" "Power Switch.5" +Battery-.3 +Battery-.4 Mode.3 Mode.4 typec.A5 typec.B5 typec.B9 typec.B12 U2.9 U5.2 U6.2 U6.3 U6.4 U6.5 U6.6 U6.14 U6.15 U6.16 U6.17 U6.19 U6.25

## Keep-outs
Board Outline Layer:
  lines w10: 3108.82,3006.38 5345.94,3006.38 5345.94,4515.39 3108.82,4515.39 3108.82,3006.38